# EAGLE board Design Palette PCB v13 (EAGLE 9.7.0)
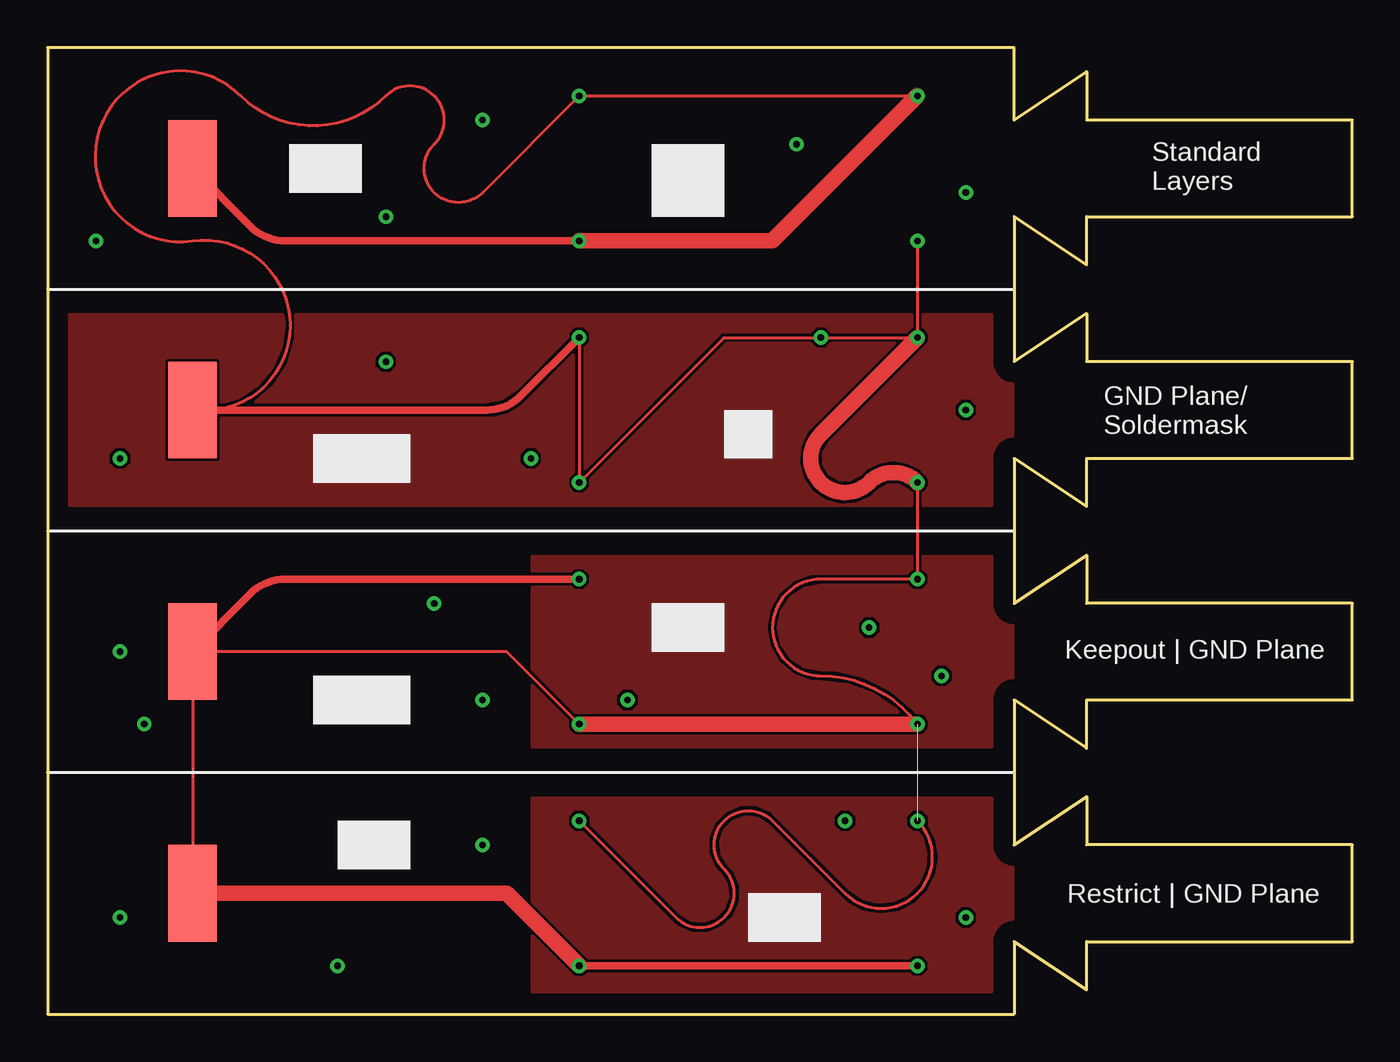
[diagram p0: board, top side]
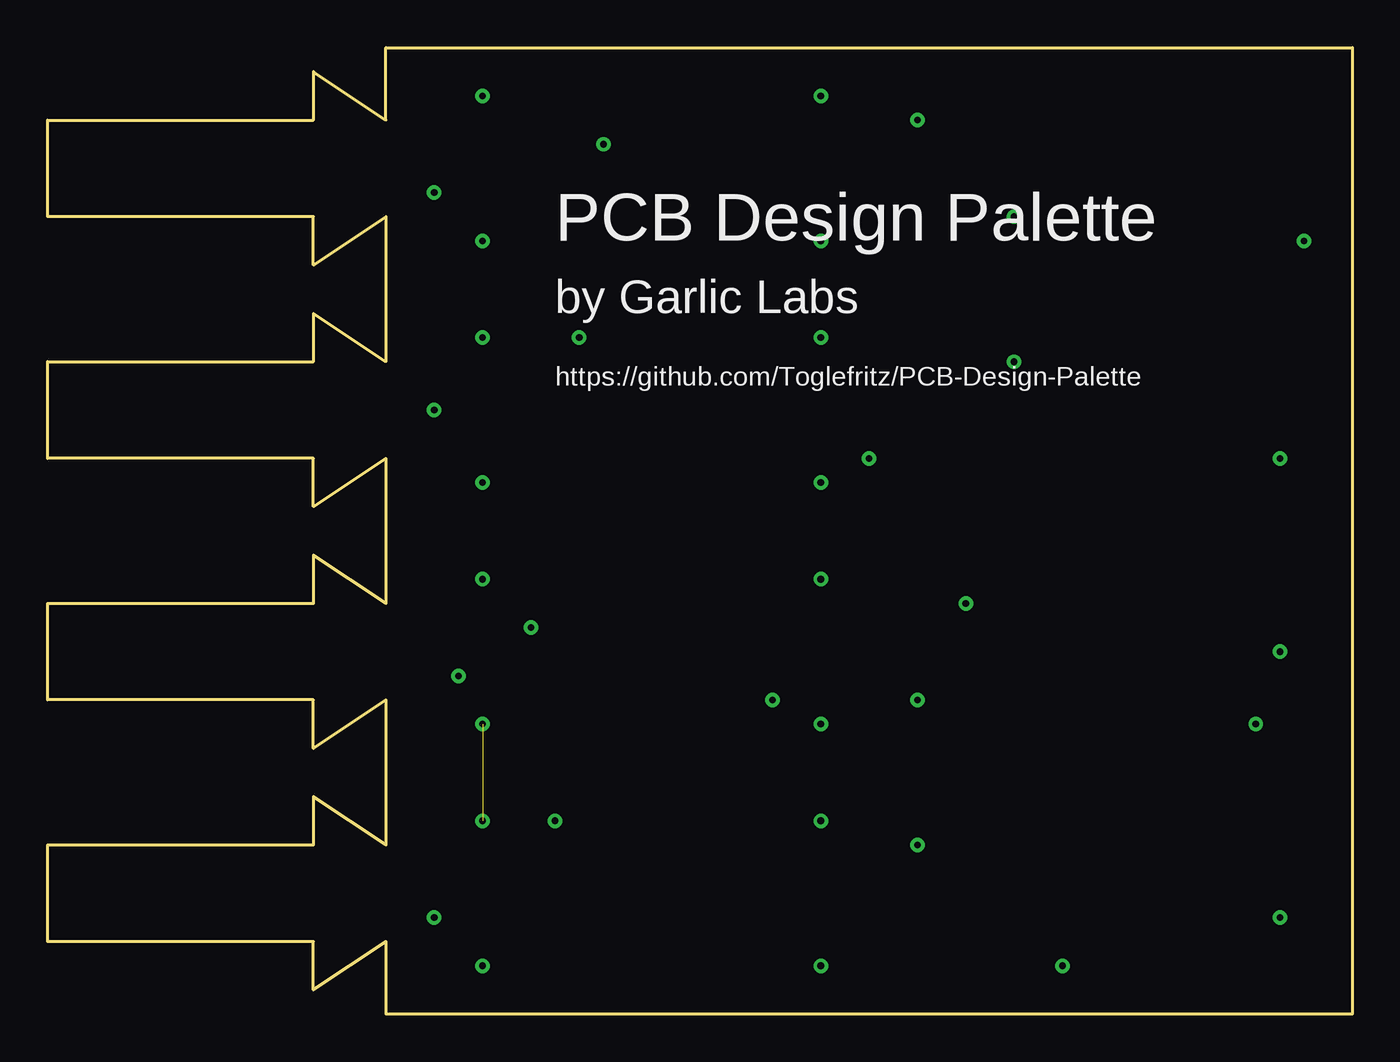
[diagram p1: board, bottom side, seen from below]

Size 68.58 x 50.8 mm. Coordinates in mm from the lower left corner, seen from the top.
Outline: 0,0 50.8,0 50.8,3.81 54.61,1.27 54.61,3.81 68.58,3.81 68.58,8.89 54.61,8.89 54.61,11.43 50.8,8.89 50.8,16.51 54.61,13.97 54.61,16.51 68.58,16.51 68.58,21.59 54.61,21.59 54.61,24.13 50.8,21.59 50.8,29.21 54.61,26.67 54.61,29.21 68.58,29.21 68.58,34.29 54.61,34.29 54.61,36.83 50.8,34.29 50.8,41.91 54.61,39.37 54.61,41.91 68.58,41.91 68.58,46.99 54.61,46.99 54.61,49.53 50.8,46.99 50.8,50.8 0,50.8 0,0
Copper layers (1*16): Top / Bottom
Stack-up Default Layer Stack: Top User Defined 0.035mm / Dielectric-1 User Defined 1.5mm / Bottom User Defined 0.035mm
Design rules "default": minimum track width 6mil, minimum drill 0.35mm, track to track 6mil, track to pad 6mil, pad to pad 6mil, via to via 6mil, smd to smd 6mil, copper to edge 40mil, drill to drill 6mil, minimum pad ring 10mil, minimum via ring 8mil, stop-mask expansion 4mil, vias tented up to drill 0mil, thermal gap 10mil
tKeepout: area 1.3,14 to 49.5,24.1

## Footprints (pad centres in the part's own frame; a part is rotated, then mirrored left to right if it is on the bottom)
SMD2,54-5,08 = smd 2.54 x 5.08: 1 0,0

## Placement (x,y rotation side)
PAD1  WIREPADSMD2,54-5,08  [SMD2,54-5,08]  7.62,44.45 0 top
PAD2  WIREPADSMD2,54-5,08  [SMD2,54-5,08]  7.62,31.75 0 top
PAD3  WIREPADSMD2,54-5,08  [SMD2,54-5,08]  7.62,19.05 0 top
PAD4  WIREPADSMD2,54-5,08  [SMD2,54-5,08]  7.62,6.35 0 top

## Library data of the parts
PAD1-PAD4 = wirepad

## Nets
NET: PAD1.1 PAD2.1 PAD3.1 PAD4.1

## Tracks (layer width: path | path; a pad name or v marks a point on that pad's centre or on a via)
N$1
  pour Top: 50.8,26.67 0,26.67 0,36.83 50.8,36.83
N$2
  pour Top: 25.4,24.13 25.4,13.97 50.8,13.97 50.8,24.13
N$3
  pour Top: 25.4,11.43 25.4,0 50.8,0 50.8,11.43
N$4  (via drill 0.35)
  other vias: 2.54,40.64
N$5  (via drill 0.35)
  other vias: 22.86,46.99
N$6  (via drill 0.35)
  other vias: 17.78,41.91
N$7  (via drill 0.35)
  other vias: 39.37,45.72
N$8  (via drill 0.35)
  other vias: 48.26,43.18
N$9  (via drill 0.35)
  other vias: 48.26,31.75
N$10  (via drill 0.35)
  other vias: 25.4,29.21
N$11  (via drill 0.35)
  other vias: 17.78,34.29
N$12  (via drill 0.35)
  other vias: 3.81,29.21
N$13  (via drill 0.35)
  other vias: 3.81,19.05
N$14  (via drill 0.35)
  other vias: 5.08,15.24
N$15  (via drill 0.35)
  other vias: 20.32,21.59
N$16  (via drill 0.35)
  other vias: 22.86,16.51
N$17  (via drill 0.35)
  other vias: 30.48,16.51
N$18  (via drill 0.35)
  other vias: 43.18,20.32
N$19  (via drill 0.35)
  other vias: 46.99,17.78
N$20  (via drill 0.35)
  other vias: 48.26,5.08
N$21  (via drill 0.35)
  other vias: 41.91,10.16
N$22  (via drill 0.35)
  other vias: 22.86,8.89
N$23  (via drill 0.35)
  other vias: 15.24,2.54
N$24  (via drill 0.35)
  other vias: 3.81,5.08
NET  (via drill 0.35)  (1 unrouted)
  Top 0.152: v45.72,48.26 v27.94,48.26 22.86,43.18 arc-180 20.32,45.72 arc180 17.78,48.26 arc-90 10.16,48.26 arc233 7.62,40.64 arc-196 PAD2.1 | v27.94,35.56 v27.94,27.94 35.56,35.56 v40.64,35.56 v45.72,35.56 v45.72,40.64 | v45.72,27.94 v45.72,22.86 40.64,22.86 arc180 40.64,17.78 arc-53 v45.72,15.24 | v27.94,15.24 24.13,19.05 PAD3.1 PAD4.1 | v27.94,10.16 33.02,5.08 arc180 35.56,7.62 arc-180 38.1,10.16 41.91,6.35 arc180 v45.72,10.16
  Top 0.406: v27.94,40.64 12.48,40.64 arc-45 10.69,41.38 PAD1.1 | PAD2.1 23.08,31.75 arc45 24.87,32.49 v27.94,35.56 | PAD3.1 10.69,22.12 arc-45 12.48,22.86 v27.94,22.86 | v27.94,2.54 v45.72,2.54
  Top 0.813: v45.72,48.26 38.1,40.64 v27.94,40.64 | v45.72,35.56 40.64,30.48 arc180 43.18,27.94 arc-90 v45.72,27.94 | v45.72,15.24 v27.94,15.24 | PAD4.1 24.13,6.35 v27.94,2.54

## Text on the board
tPlace: Standard / Layers | GND Plane/ / Soldermask | Keepout | GND Plane | Restrict | GND Plane
bPlace: PCB Design Palette | by Garlic Labs | https://github.com/Toglefritz/PCB-Design-Palette